# Altium PCB peggy-optical-board.PcbDoc
Units mil, origin at the board's own origin, x right, y up, seen from the top; angles counter-clockwise.
Board outline 800 x 2400 mil, 2 copper layers (Top Layer, Bottom Layer), stack 62.8 mil thick; 13 components, 8 nets, 39 pads, 2 vias.
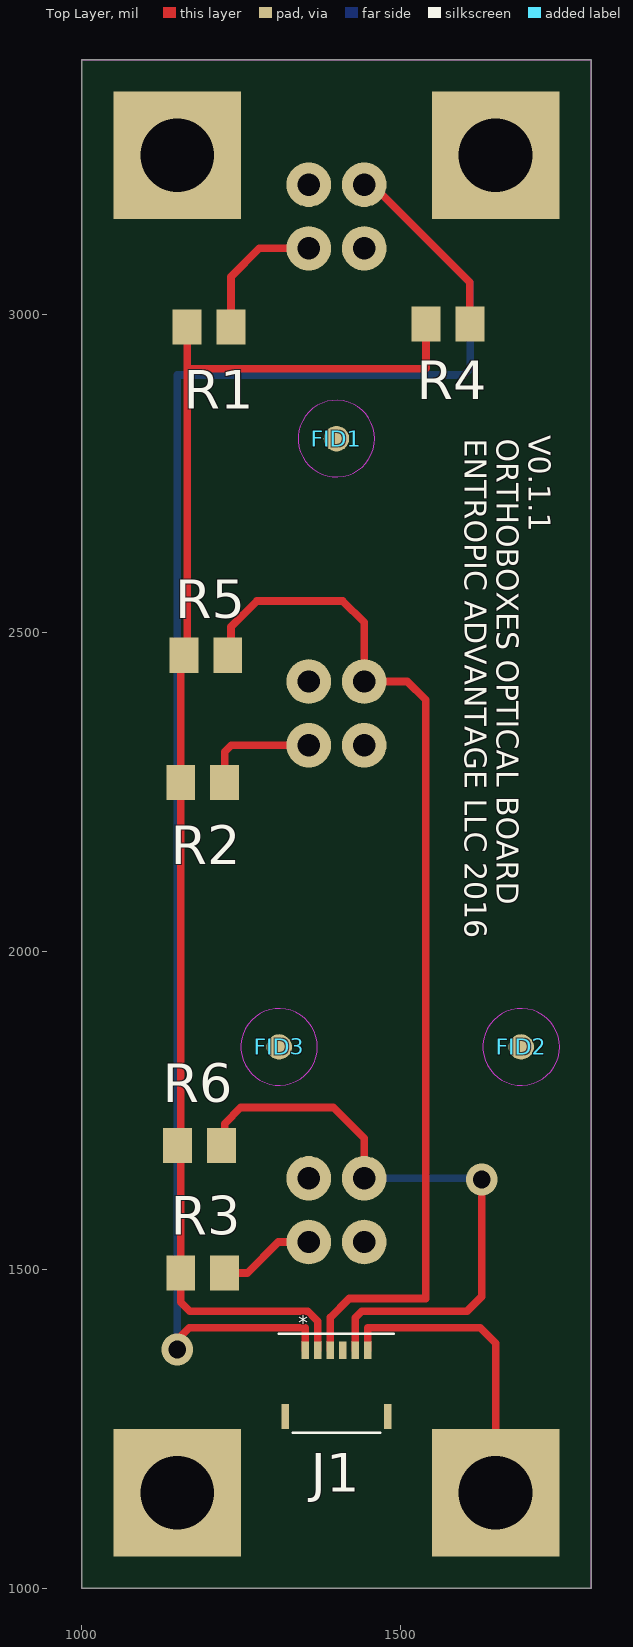
[diagram p0: Top Layer view]
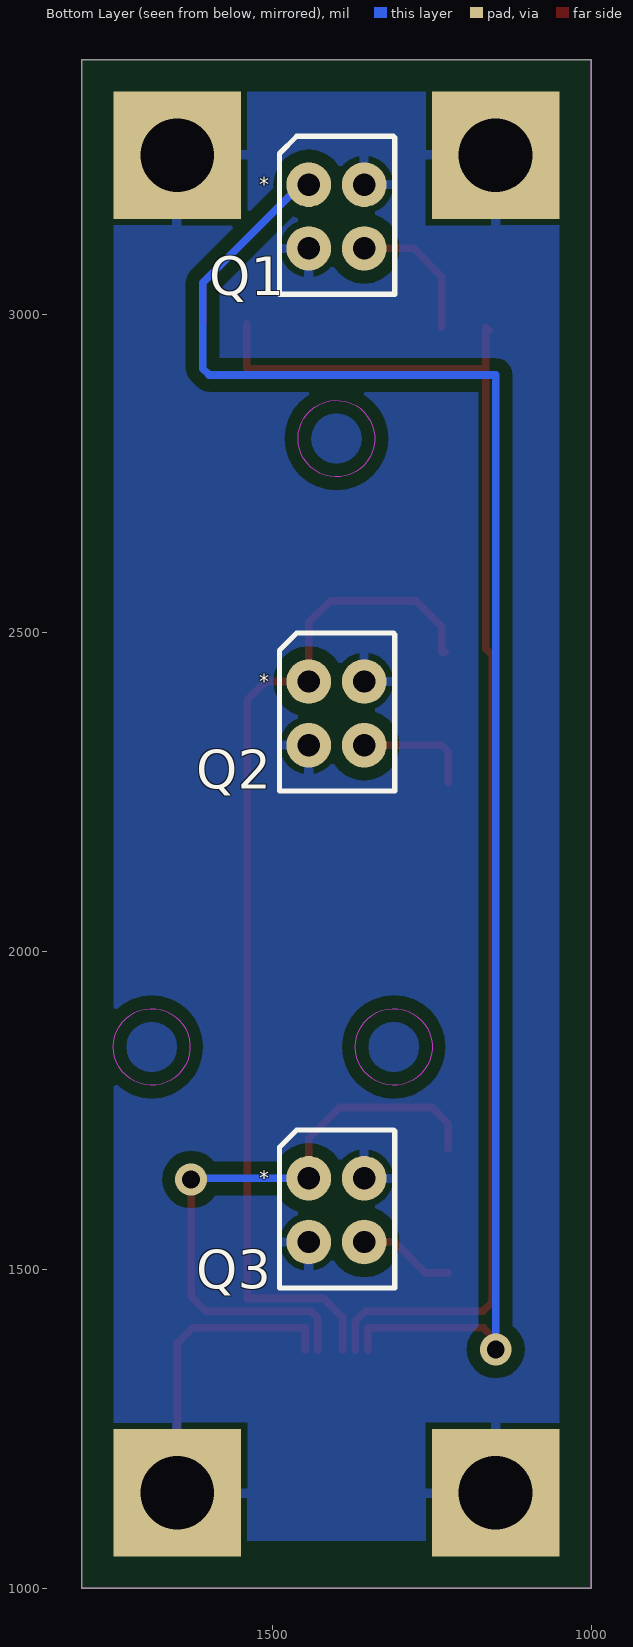
[diagram p1: Bottom Layer view, seen from below]
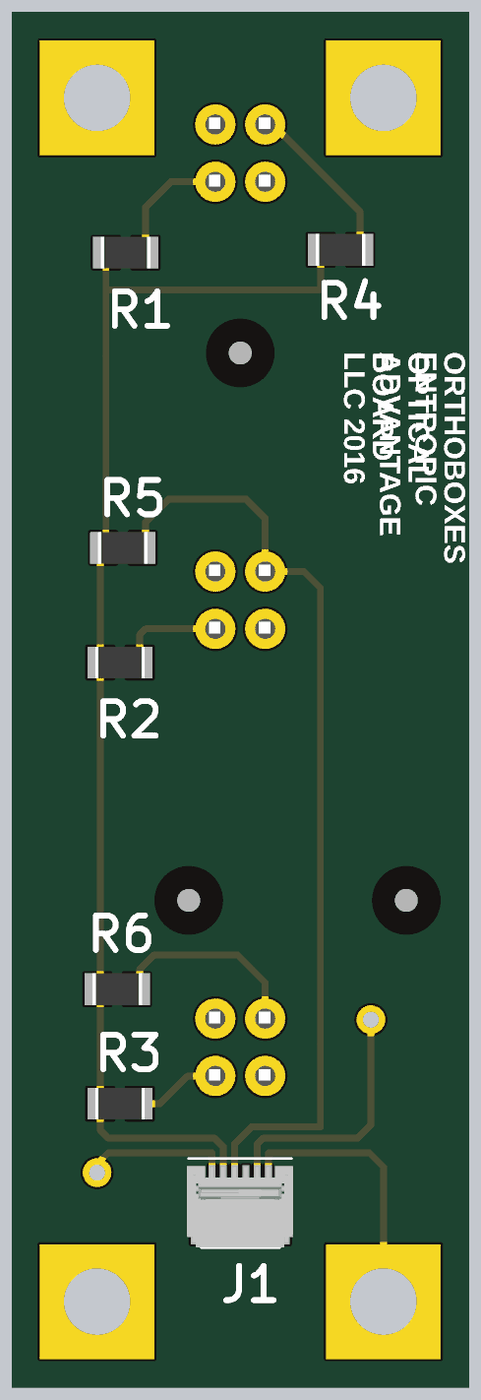
[diagram p2: 3D render of the assembled board from above, using the file's embedded part models]
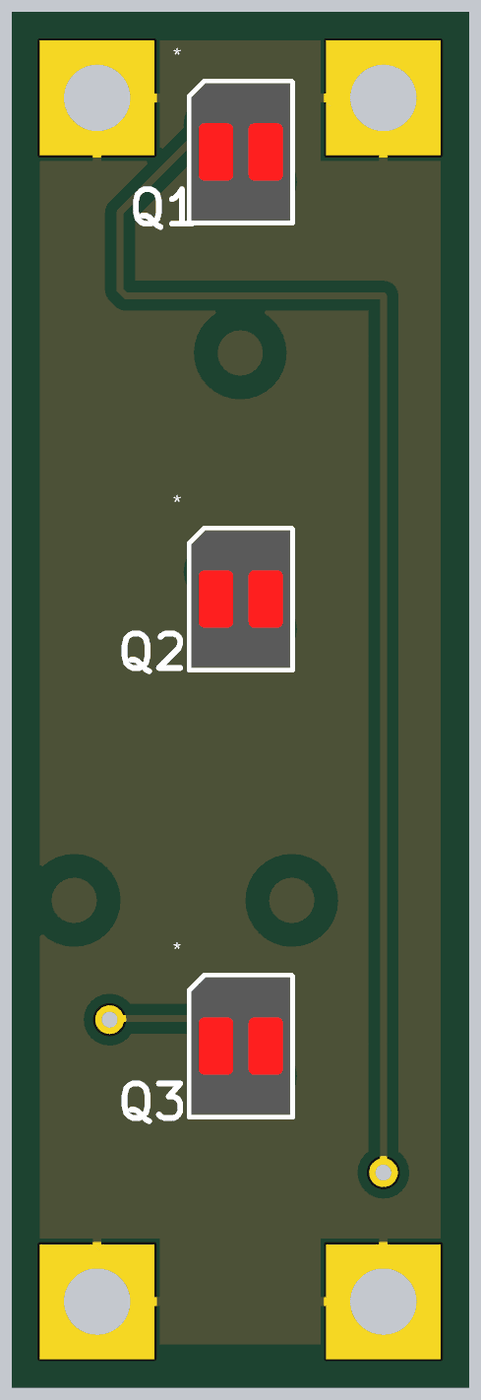
[diagram p3: 3D render of the assembled board from below, using the file's embedded part models]

## Layer stack, top to bottom
Top Solder: solder mask 1, Solder Resist, Dk 3.5
Top Layer: signal copper 1.4
Dielectric 1: dielectric 60, FR-4, Dk 4.8
Bottom Layer: signal copper 1.4
Bottom Solder: solder mask 1, Solder Resist, Dk 3.5

## Board outline
1000,1000 1800,1000 1800,3400 1000,3400

## Design rules (kind name [scope] priority, off if disabled: settings)
BoardOutlineClearance [All] p1: gap=30
Clearance [All] p1: gap=6 except(10: SMDPad-Via THPad-Via Via-Via; 20: Arc-Poly Track-Poly SMDPad-Poly THPad-Poly Via-Poly Fill-Poly Poly-Poly)
ComponentClearance [All] p1: gap=50 collisioncheckmode=3 verticalgap=100 showdistances=TRUE
DiffPairsRouting [All] p1: maxlimit=10 minlimit=10 mostfreqgap=10 toplayer_minwidth=8 toplayer_maxwidth=15 toplayer_prefwidth=8 bottomlayer_minwidth=8 bottomlayer_maxwidth=15 bottomlayer_prefwidth=8 maxuncoupledlength=500
HoleSize [All] p1: absolutevalues=TRUE maxlimit=265 minlimit=13 maxpercent=80.000 minpercent=20.000
MinimumAnnularRing [All] p1: minimumring=7
MinimumSolderMaskSliver [All] p1: minsoldermaskwidth=4
PlaneClearance [All] p1: clearance=30
PlaneConnect [All] p1: planeconnectstyle=Relief reliefexpansion=20 reliefentries=4 reliefconductorwidth=15 reliefairgap=10
PolygonConnect [All] p1: connectstyle=Relief reliefconductorwidth=15 reliefentries=4 polygonreliefangle="90 Angle" airgapwidth=10
RoutingVias [All] p1: holewidth=15 width=30 viastyle="Through Hole" minholewidth=10 minwidth=15 maxholewidth=40 maxwidth=50
SilkToSilkClearance [All] p1: silktosilkclearance=4
SilkToSolderMaskClearance [IsPad] p1: minsilkscreentomaskgap=5 clearancetoexposedcopper=TRUE
SolderMaskExpansion [All] p1: expansion=4
Width [InNetClass('All Nets')] p1: maxlimit=30 minlimit=8 preferedwidth=10 minimp=50.000000 maximp=50.000000 favimp=50.000000
22 further rules are at their usual default settings.

## Components (designator, comment, footprint, x,y, rotation, side; value= is the part's Value field where it differs from the comment)
FID1 "FIDUCIAL" FID 1400,2805 r0 top
FID2 "FIDUCIAL" FID 1690,1850 r90 top
FID3 "FIDUCIAL" FID 1310,1850 r90 top
J1 "5034800600" "MOLEX 503480-0600" 1319.68,1269.68 r0 top locked
Q1 "OPB606A" OPB606A 1443.5,3203.7 r180 bottom
Q2 "OPB606A" OPB606A 1443.5,2423.7 r180 bottom
Q3 "OPB606A" OPB606A 1443.5,1643.7 r180 bottom
R1 "180R" RESC2012X07N_SAMSUNG 1200,2980 r0 top
R2 "180R" RESC2012X07N_SAMSUNG 1190,2265 r0 top
R3 "180R" RESC2012X07N_SAMSUNG 1190,1495 r0 top
R4 "4.99K" RESC2012X07N_SAMSUNG 1575,2985 r180 top
R5 "4.99K" RESC2012X07N_SAMSUNG 1195,2465 r180 top
R6 "4.99K" RESC2012X07N_SAMSUNG 1185,1695 r180 top

## Footprints (in the part's own frame and the unit in brackets; to place one, negate y for a bottom-side part, rotate by r counter-clockwise, add the part's x,y. Pads: shape width x height; smd on the part's side, far side on the other; paste and mask are expansions set on the pad)
FID [mil] "FIDUCIAL"
  round 40 smd paste+0 mask+40: 0(0,0)
  Keep-Out Layer circle w1: c0,0 r60.21
"MOLEX 503480-0600" [mm] "MOLEX FFC Connector 6pos"
  rect 0.3x0.7 smd: 1(0.79,2.65) 2(1.29,2.65) 3(1.79,2.65) 4(2.29,2.65) 5(2.79,2.65) 6(3.29,2.65)
  rect 0.3x1 smd: P1(0,0) P2(4.08,0)
  silkscreen extent -0.25,-0.65 4.32,3.3, body extent -0.32,-0.63 4.38,2.97, height 1.88
OPB606A [mil] "Optek OPB606A"
  round 70 hole 35: 1(0,0) 2(0,-100) 3(87.01,-100) 4(87.01,0)
  silkscreen extent -46,-172 135,76, body extent -42,-168 131,72, height 177
RESC2012X07N_SAMSUNG [mm] "Chip Resistor, 2-Leads, Body 2.00x1.25mm, IPC Medium Density"
  rect 1.15x1.4 smd: 1(-0.875,0) 2(0.875,0)
  body extent -1.1,-0.7 1.1,0.7, height 0.65

## Part data
FID1 FID2 FID3: library part "Fiducial 1"
J1: "CONN FFC FPC 6POS 0.50MM R/A"
Q1 Q2 Q3: "SENSR OPTO TRANS 1.27MM REFL PCB"
R1 R2 R3: library part RC2012F181CS, "RES SMD 180 OHM 1% 1/8W 0805"
R4 R5 R6: library part RC2012F4991CS, "RES SMD 4.99K OHM 1% 1/8W 0805"

## Free pads (board coordinates)
  rect 200x200 hole 116: GND(1150,1150) GND(1150,3250) GND(1650,1150) GND(1650,3250)

## Via types
v1: diameter 50, hole 28, Top Layer to Bottom Layer, 2 vias

## Nets (pads, with @x,y where several pads share a name; then routed paths per layer and width w, separated by ;. In a path a pad name is that pad's centre, name@x,y a point inside that pad or via, vN(x,y) a via of type N, cw(c..) or ccw(c..) an arc to the next point about the centre after c; other vN are vias at no path point)
5V: J1.2 R1.1 R2.1 R3.1 R4.2 R5.2 R6.2 | length 2259.3
  Top Layer w12: R1.1@1160.55,2975 R1.1 1165.55,2915 ; J1.2 1370.47,1419.53 1355,1435 1170,1435 1155.55,1449.45 R3.1 R2.1 1155.55,2465 1165.55,2475 1165.55,2915 ; R4.2 1540.55,2915.55 1540,2915 1165.55,2915
GND: J1.6 pad.GND Q1.2 Q1.4 Q2.2 Q2.4 Q3.2 Q3.4 | length 481
  Top Layer w12: J1.6 1449.21,1409.21 1625.79,1409.21 1650,1385 pad.GND@1650,1150
NetJ1_1: J1.1 Q1.1 R4.1 | length 2913.2
  Top Layer w12: v1(1150,1375) 1150,1390 1169.21,1409.21 1350.79,1409.21 J1.1 ; Q1.1 1456.3,3203.7 1609.45,3050.55 R4.1
  Bottom Layer w12: v1(1150,1375) 1150,2905 1600,2905 1610,2915 1610,3050 1456.3,3203.7 Q1.1
NetJ1_3: J1.3 Q2.1 R5.1 | length 1638.7
  Top Layer w12: R5.1@1229.45,2470 1234.45,2470 1234.45,2509.45 1275,2550 1410,2550 1443.5,2516.5 Q2.1 1511.3,2423.7 1540,2395 1540,1455 1420,1455 1390.16,1425.16 J1.3
NetJ1_5: J1.5 Q3.1 R6.1 | length 984.2
  Top Layer w12: R6.1@1224.45,1690 1224.45,1729.45 1250,1755 1395,1755 1443.5,1706.5 Q3.1 ; J1.5 1429.53,1424.53 1440,1435 1605,1435 1628.15,1458.15 v1(1628.15,1641.85)
  Bottom Layer w12: Q3.1 1626.3,1643.7 v1(1628.15,1641.85)
NetQ1_3: Q1.3 R1.2 | length 219.8
  Top Layer w12: R1.2 1234.45,3059.45 1278.7,3103.7 Q1.3
NetQ2_3: Q2.3 R2.2 | length 184.6
  Top Layer w12: R2.2 1224.45,2313.15 1235,2323.7 Q2.3
NetQ3_3: Q3.3 R3.2 | length 152.2
  Top Layer w12: R3.2 1260,1495 1308.7,1543.7 Q3.3
pads on no net: FID1.0 FID2.0 FID3.0 J1.4 J1.P1 J1.P2

## Polygon pours and split planes (outlines as drawn)
GND on Bottom Layer "GND" (solid, pour order 0): 1050,1075 1750,1075 1750,3350 1050,3350

## Keep-outs
Keep-Out Layer:
  the board outline again, w1

## Silkscreen, mask and mechanical layers (free items; w line width, h text height)
Top Overlay:
  text "V0.1.1" at 1690,2810 h59.06 r270
  text "ENTROPIC ADVANTAGE LLC 2016" at 1590,2805 h59.06 r270
  text "ORTHOBOXES OPTICAL BOARD" at 1640,2805 h59.06 r270

## Text inside footprints (layer, text, board x,y; h text height)
J1: Top Overlay "*" at 1355.68,1397.68 h39.37
Q1: Bottom Overlay "*" at 1505.5,3184.7 h39.37
Q2: Bottom Overlay "*" at 1505.5,2404.7 h39.37
Q3: Bottom Overlay "*" at 1505.5,1624.7 h39.37